# Altium PCB PCB1.PcbDoc
Units mm, origin at the board's own origin, x right, y up, seen from the top; angles counter-clockwise.
Board outline 144 x 160 mm, 2 copper layers (Top Layer, Bottom Layer); 92 components, 60 nets, 325 pads, 2 vias.
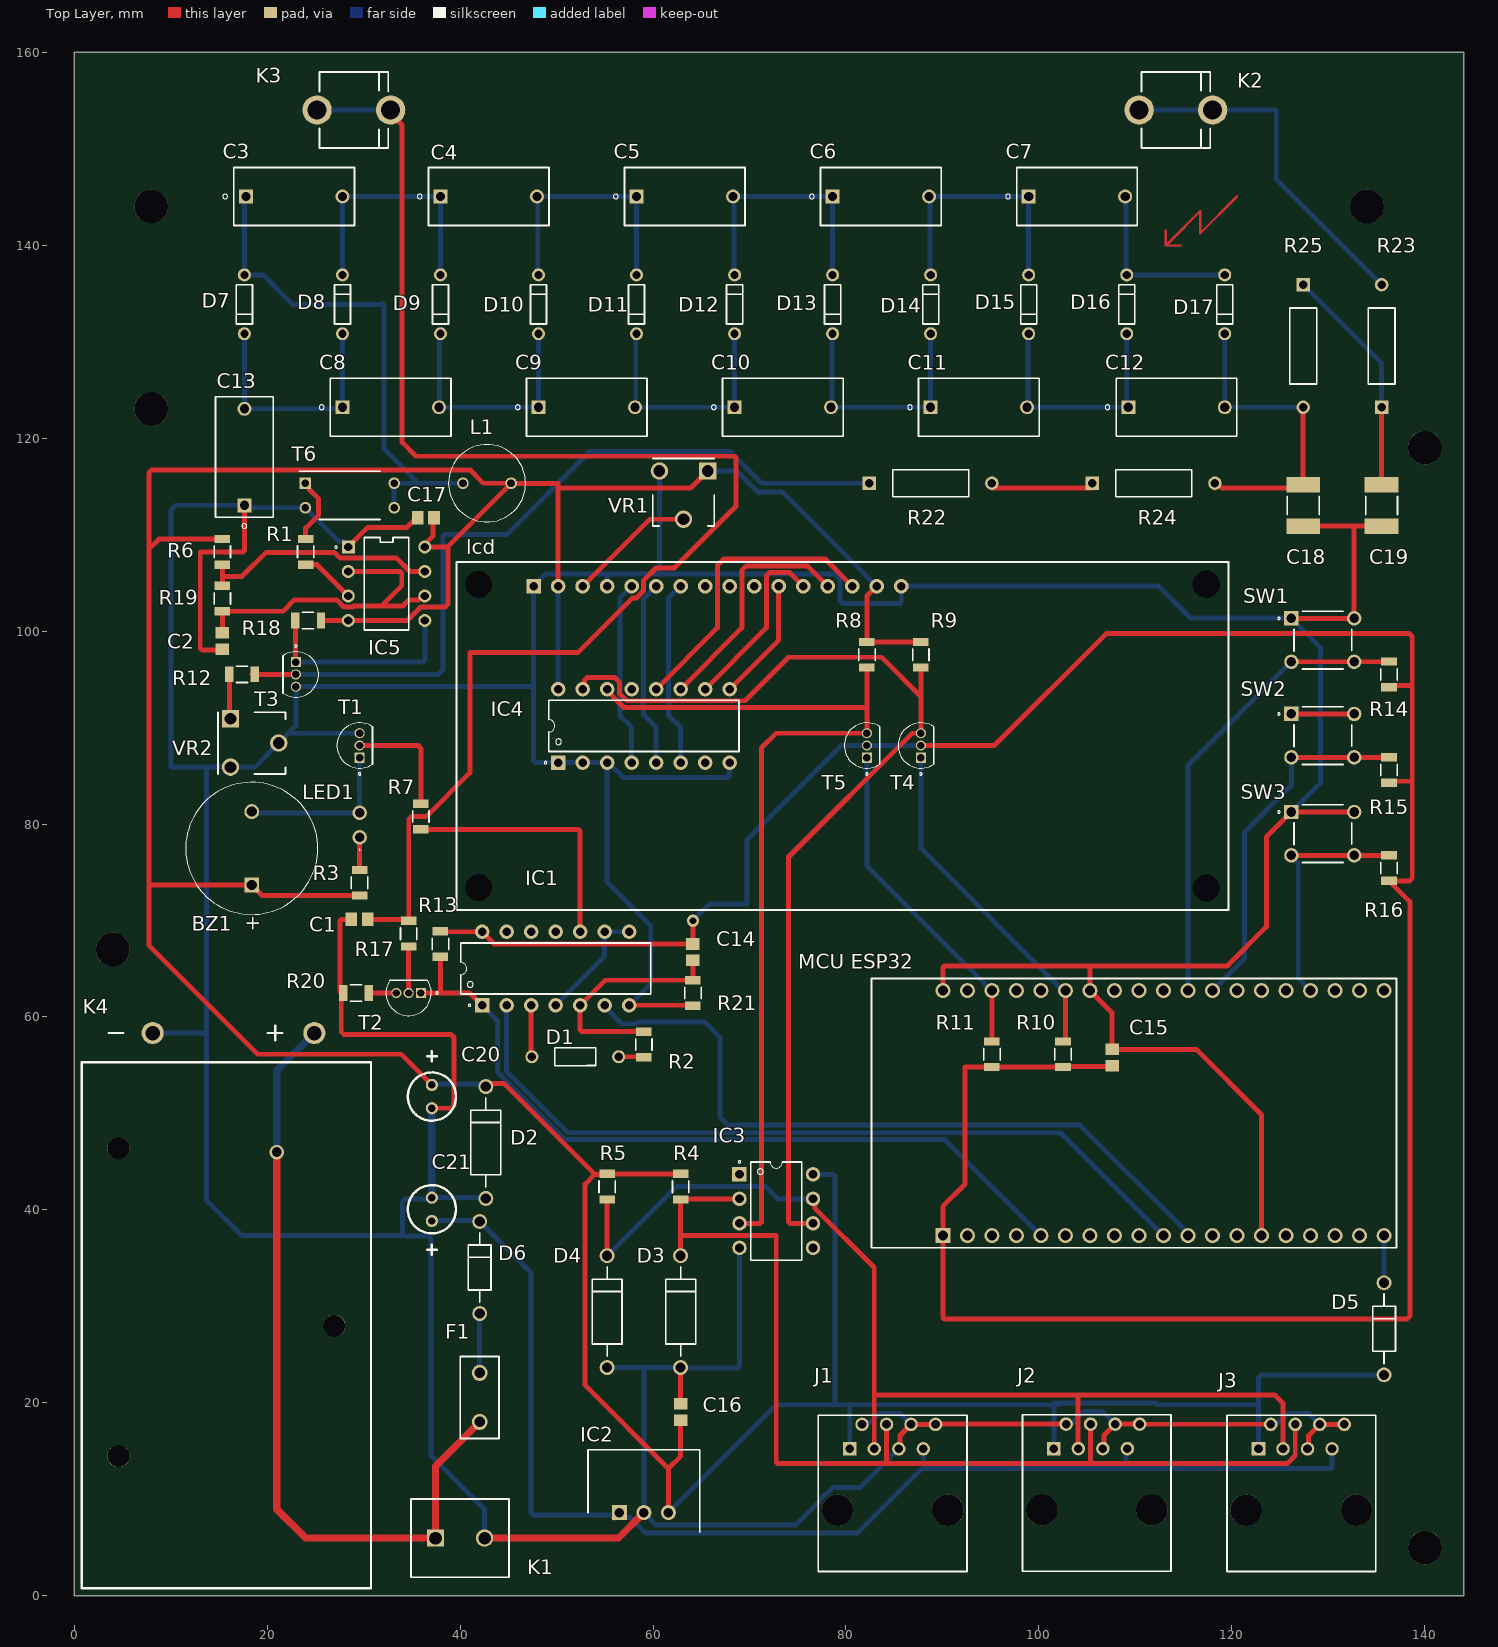
[diagram p0: Top Layer view]
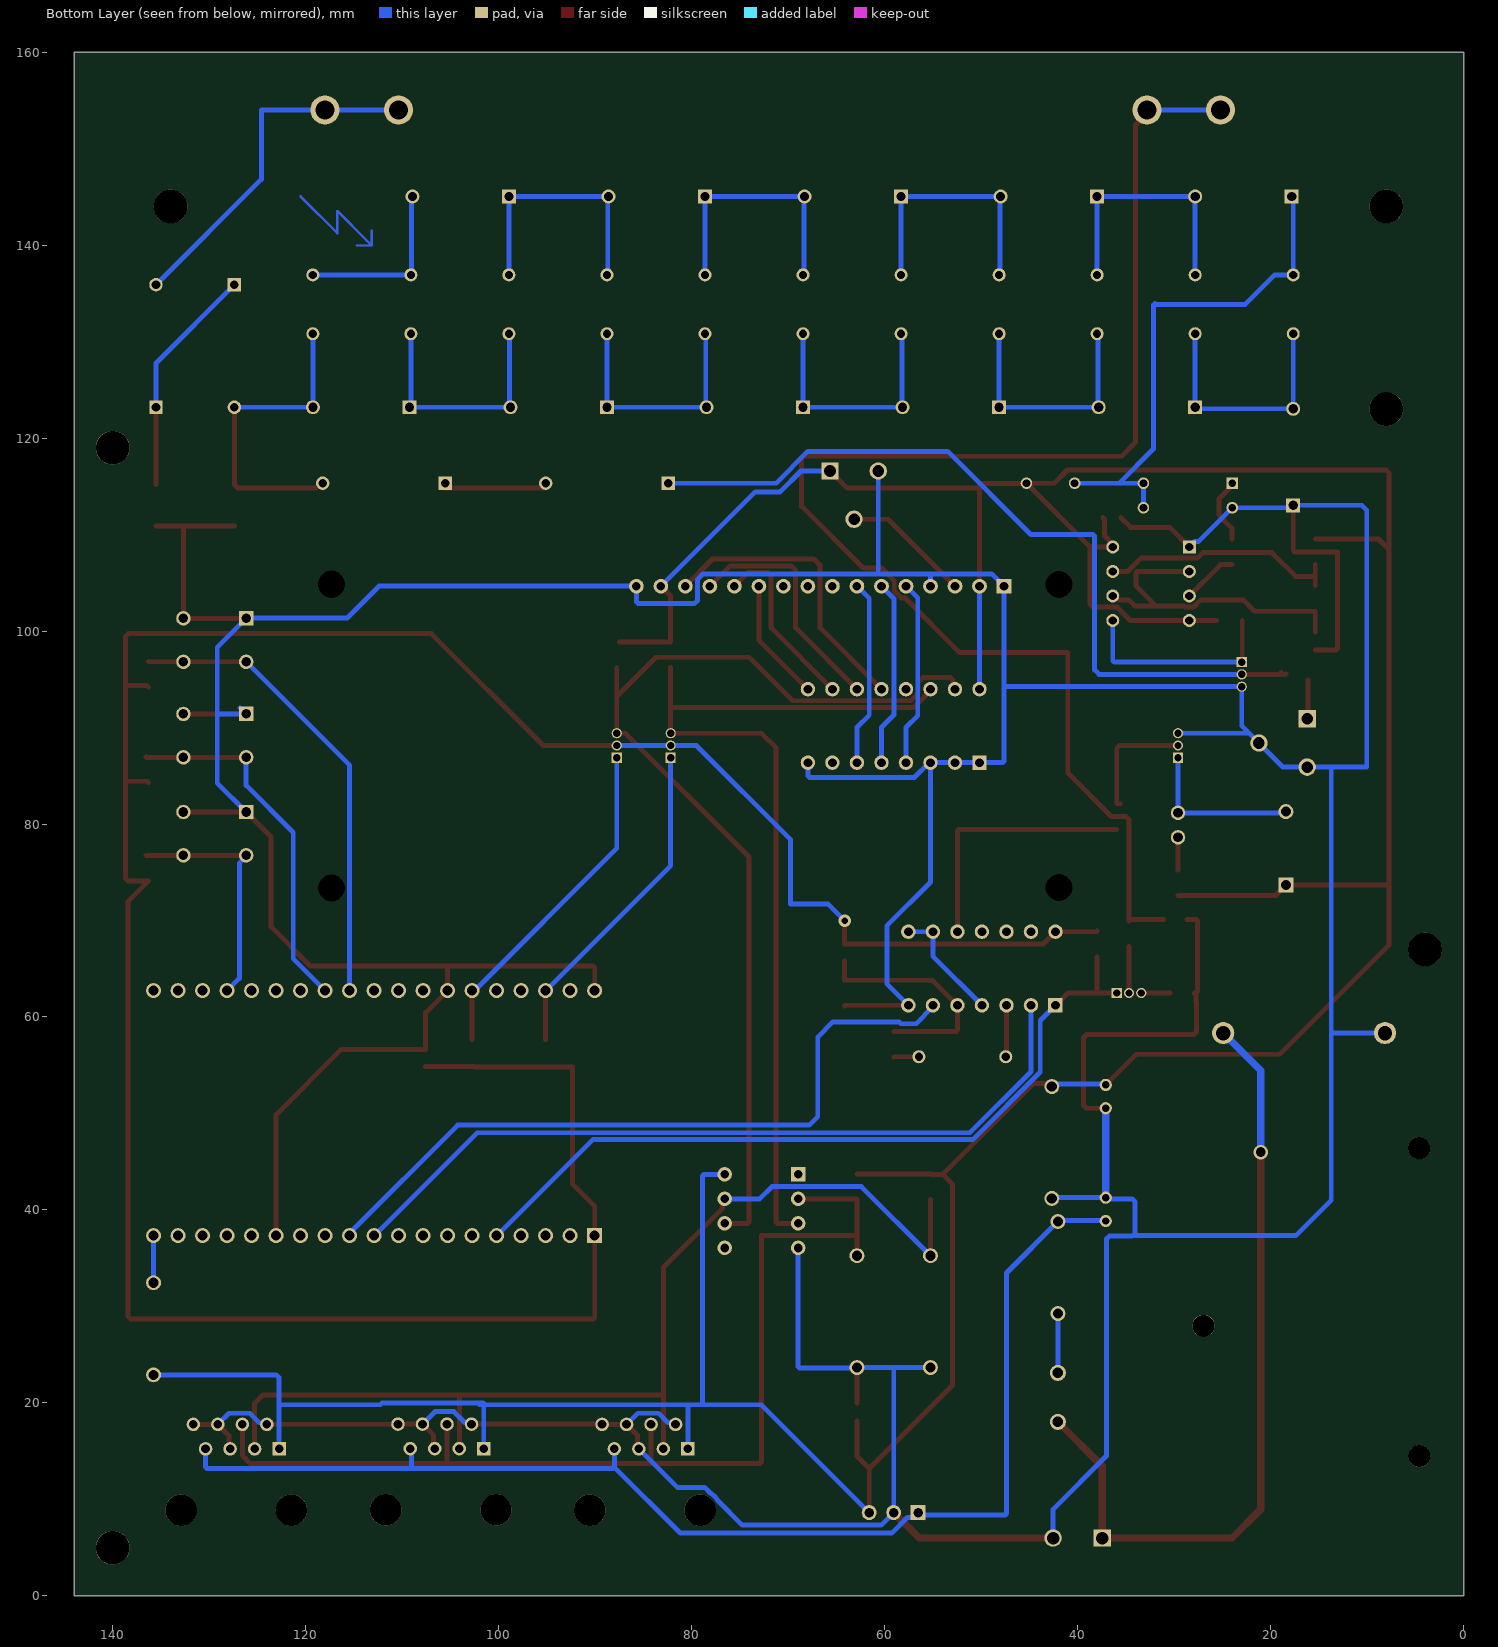
[diagram p1: Bottom Layer view, seen from below]

## Layer stack, top to bottom
Top Solder: solder mask 0.0102, Solder Resist, Dk 3.5
Top Layer: signal copper 0.0356
Dielectric 1: dielectric 0.32, FR-4, Dk 4.8
Bottom Layer: signal copper 0.0356
Bottom Solder: solder mask 0.0102, Solder Resist, Dk 3.5

## Board outline
0,0 0,160 144,160 144,0

## Design rules (kind name [scope] priority, off if disabled: settings)
Clearance [All] p1: gap=0.254 ignorepadtopadclearanceinfootprint=FALSE except(0: Arc-Hole Track-Hole SMDPad-Hole THPad-Hole Via-Hole Fill-Hole Poly-Hole Region-Hole Text-Hole; 0.127: SMDPad-SMDPad; 0.15: Arc-Text Track-Text SMDPad-Text THPad-Text; 0.2: Arc-Arc Arc-Track Arc-SMDPad Arc-THPad Track-Track Track-SMDPad Track-THPad SMDPad-THPad THPad-THPad)
HoleSize [All] p1: absolutevalues=TRUE maxlimit=6.3 minlimit=0.2 maxpercent=80.000 minpercent=20.000
HoleToHoleClearance [All] p1: gap=0.5 allowstackedmicrovias=TRUE
MinimumSolderMaskSliver [All] p1: minsoldermaskwidth=0
PolygonConnect [All] p1: connectstyle=Relief reliefconductorwidth=0.254 reliefentries=4 polygonreliefangle="90 Angle" airgapwidth=0.254
RoomDefinition Sheet1 [InComponentClass('Sheet1')] p1: confinementstyle=ConfineOut formatcopy=TRUE lockcomponents=FALSE outline -38.227,-119.126 12.573,-119.126 12.573,-93.726 -38.227,-93.726
RoutingVias [All] p1: holewidth=0.711 width=1.27 viastyle="Through Hole" minholewidth=0.711 minwidth=1.27 maxholewidth=0.711 maxwidth=1.27
SilkToSilkClearance [All] p1: silktosilkclearance=0
SilkToSolderMaskClearance [IsPad] p1: minsilkscreentomaskgap=0.15 clearancetoexposedcopper=TRUE
SolderMaskExpansion [All] p1: expansion=0.102 istentingtop=FALSE
Width [All] p1: maxlimit=0.762 minlimit=0.254 preferedwidth=0.508 minimp=50.000000 maximp=50.000000 favimp=50.000000
25 further rules are at their usual default settings.

## Components (designator, comment, footprint, x,y, rotation, side; value= is the part's Value field where it differs from the comment)
BZ1 "KPEG242" KINGS-KPEG242-2 18.415,77.47 r90 top
C1 "330 pF" CAPC2013X70X45NL10T25 29.591,70.104 r0 top
C2 "330 pF" CAPC2013X70X45NL10T25 15.367,98.969 r90 top
C3 "22nF" VISH-BFC233820104-2_V 17.813,145.034 r0 top
C4 "22nF" VISH-BFC233820104-2_V 37.973,145.034 r0 top
C5 "22nF" VISH-BFC233820104-2_V 58.293,145.034 r0 top
C6 "22nF" VISH-BFC233820104-2_V 78.613,145.034 r0 top
C7 "22nF" VISH-BFC233820104-2_V 98.933,145.034 r0 top
C8 "22nF" VISH-BFC233820104-2_V 27.813,123.19 r0 top
C9 "22nF" VISH-BFC233820104-2_V 48.133,123.19 r0 top
C10 "22nF" VISH-BFC233820104-2_V 68.453,123.19 r0 top
C11 "22nF" VISH-BFC233820104-2_V 88.773,123.19 r0 top
C12 "22nF" VISH-BFC233820104-2_V 109.253,123.19 r0 top
C13 "22nF" VISH-BFC233820104-2_V 17.653,113.03 r90 top
C14 "100nF X7R 50V" CAPC2013X70X45NL10T25 64.135,66.711 r90 top
C15 "100nF X7R 50V" CAPC2013X70X45NL10T25 107.569,55.789 r270 top
C16 "100nF X7R 50V" CAPC2013X70X45NL10T25 62.865,19.05 r270 top
C17 "100nF X7R 50V" CAPC2013X70X45NL10T25 36.449,111.76 r0 top
C18 "100nF 630 V" CAPC1812(4532)125_M 127.381,113.03 r90 top value=470nF
C19 "100nF 630V" CAPC1812(4532)125_M 135.509,113.03 r90 top value=470nF
C20 "100uF 16V" "100uf 16V elco" 37.084,50.546 r90 top
C21 "100uF 16V" "100uf 16V elco" 37.084,41.275 r270 top
D1 "1N4148" NXP-SOD27-2_V 51.943,55.88 r0 top
D2 "SA5.0A" ONSC-AXIAL_LEAD-2-59AA-01_P 42.672,46.99 r270 top
D3 "SA5.0A" ONSC-AXIAL_LEAD-2-59AA-01_P 62.865,29.464 r270 top
D4 "SA5.0A" ONSC-AXIAL_LEAD-2-59AA-01_P 55.245,29.464 r270 top
D5 "1N5819" ONSC-AXIAL_LEAD-2-59-10_P 135.763,27.686 r270 top
D6 "1N5819" ONSC-AXIAL_LEAD-2-59-10_P 42.037,34.036 r270 top
D7 "BAV21" MCSM-DO-35-2 17.653,133.858 r270 top
D8 "BAV21" MCSM-DO-35-2 27.813,133.858 r90 top
D9 "BAV21" MCSM-DO-35-2 37.973,133.858 r270 top
D10 "BAV21" MCSM-DO-35-2 48.133,133.858 r90 top
D11 "BAV21" MCSM-DO-35-2 58.293,133.858 r270 top
D12 "BAV21" MCSM-DO-35-2 68.453,133.858 r90 top
D13 "BAV21" MCSM-DO-35-2 78.613,133.858 r270 top
D14 "BAV21" MCSM-DO-35-2 88.773,133.858 r90 top
D15 "BAV21" MCSM-DO-35-2 98.933,133.858 r270 top
D16 "BAV21" MCSM-DO-35-2 109.093,133.858 r90 top
D17 "BAV21" MCSM-DO-35-2 119.253,133.858 r270 top
F1 "500mA" 39211000000 42.037,23.114 r270 top
IC1 "CD4093BE" N0014A 49.911,65.024 r90 top
IC2 "173010578" 173010578 56.515,8.636 r0 top
IC3 "P82B715P" P0008A 72.771,39.878 r0 top
IC4 "PCF8574N" N0016A 59.055,90.17 r90 top
IC5 "ICM7555IPAZ" Intersil_ICM7555IPAZ_0 32.385,104.902 r0 top
J1 "615008138021" 615008138021 84.836,10.64 r0 top
J2 "615008138021" 615008138021 105.985,10.668 r0 top
J3 "615008138021" 615008138021 127.194,10.64 r0 top
K1 "1729128" PHOE-1729128-2_V 40,6 r0 top
K2 "6mm fuseholder" FP-102-MFG 114.19,154 r180 top
K3 "6mm fuseholder" FP-102-MFG 29,154 r180 top
K4 "9V Battery" PCBComponent_1#1 0.775,55.29 r180 top
L1 "47uH" WE-TI-LS 42.799,115.316 r180 top
lcd "" PCBComponent_1#2 47.625,104.648 r0 top locked
LED1 "151033GS03000" 151033GS03000 29.591,78.613 r90 top
"MCU ESP32" "ESP32-DEVKITC-32D" MODULE_ESP32-DEVKITC-32D 109.803,50.038 r90 top locked
R1 "47" FP-RC1206-IPC_C 24.003,108.204 r270 top
R2 "330" FP-RC1206-IPC_C 59.055,57.15 r90 top
R3 "330" FP-RC1206-IPC_C 29.591,73.914 r90 top
R4 "330" FP-RC1206-IPC_C 62.865,42.418 r90 top
R5 "330" FP-RC1206-IPC_C 55.245,42.418 r90 top
R6 "3k3" FP-RC1206-IPC_C 15.367,108.204 r90 top
R7 "4k7" FP-RC1206-IPC_C 35.941,80.772 r270 top
R8 "4k7" FP-RC1206-IPC_C 82.169,97.536 r90 top
R9 "4k7" FP-RC1206-IPC_C 87.757,97.536 r90 top
R10 "4k7" FP-RC1206-IPC_C 102.489,56.134 r270 top
R11 "4k7" FP-RC1206-IPC_C 95.123,56.134 r270 top
R12 "5k6" FP-RC1206-IPC_C 17.399,95.504 r0 top
R13 "10k" FP-RC1206-IPC_C 37.973,67.564 r270 top
R14 "10k" FP-RC1206-IPC_C 136.271,95.504 r270 top
R15 "10k" FP-RC1206-IPC_C 136.271,85.598 r270 top
R16 "10k" FP-RC1206-IPC_C 136.271,75.438 r270 top
R17 "27k" FP-RC1206-IPC_C 34.671,68.637 r90 top
R18 "27k" FP-RC1206-IPC_C 24.257,101.092 r0 top
R19 "27k" FP-RC1206-IPC_C 15.367,103.378 r90 top
R20 "100k" FP-RC1206-IPC_C 29.21,62.484 r180 top
R21 "470k" FP-RC1206-IPC_C 64.135,62.484 r90 top
R22 "1M" RES_VR25 95.123,115.316 r0 top
R23 "1M" RES_VR25 127.381,123.19 r270 top
R24 "4M7" RES_VR25 118.237,115.316 r0 top
R25 "4M7" RES_VR25 135.509,135.89 r90 top
SW1 "tactile switch 10mm" TECO-1825910-6_V 129.413,99.06 r0 top
SW2 "tactile switch 10mm" TECO-1825910-6_V 129.413,89.154 r0 top
SW3 "tactile switch 10mm" TECO-1825910-6_V 129.413,78.994 r0 top
T1 "BC547B" ONSC-TO-92-3-29-11 29.591,88.138 r90 top
T2 "BC547B" ONSC-TO-92-3-29-11 34.671,62.484 r180 top
T3 "BC547B" ONSC-TO-92-3-29-11 22.987,95.504 r270 top
T4 "2N7000" ONSC-TO-92-3-29-11 87.757,88.138 r90 top
T5 "2N7000" ONSC-TO-92-3-29-11 82.169,88.138 r90 top
T6 "" DIP920W60P254L490H337Q4N 28.575,114.046 r0 top
VR1 "" RM065102 65.659,116.586 r180 top
VR2 "" RM065102 16.209,90.892 r270 top

## Footprints (in the part's own frame and the unit in brackets; to place one, negate y for a bottom-side part, rotate by r counter-clockwise, add the part's x,y. Pads: shape width x height; smd on the part's side, far side on the other; paste and mask are expansions set on the pad)
"100uf 16V elco" [mil]
  round 50 hole 30: 1(0,0) 2(95,0)
  silkscreen extent -51,-98 232,98
151033GS03000 [mm]
  round 1.5 hole 1: 1(0,0) 2(2.54,0)
  silkscreen extent -1.33,-0.05 -1.23,0.05, body extent -0.4,-1.5 2.94,1.5, height 5.65
173010578 [mm]
  rect 1.55x1.55 hole 1: 1(0,0)
  round 1.55 hole 1: 2(2.54,0) 3(5.08,0)
  silkscreen extent -3.26,-2 8.34,6.5
39211000000 [mm]
  round 1.65 hole 1.1: 1(0,0) 2(5.08,0)
  silkscreen extent -1.71,-2 6.79,2, body extent -1.71,-2 6.79,2, height 8.1
615008138021 [mm] "Modular Jack Vertical Plastic 8P8C"
  rect 1.4x1.4 hole 0.9: 1(-4.445,4.6)
  round 1.4 hole 0.9: 2(-3.175,7.14) 3(-1.905,4.6) 4(-0.635,7.14) 5(0.635,4.6) 6(1.905,7.14) 7(3.175,4.6) 8(4.445,7.14)
  round 3.25 hole 3.25 unplated: MH1(-5.715,-1.75) MH2(5.715,-1.75)
  silkscreen extent -7.7,-8.1 7.7,8.1, body extent -7.7,-8.1 7.7,8.1, height 16.5
CAPC1812(4532)125_M [mm] "Chip Capacitor, Body 4.5x3.2mm, Height 1.25mm, IPC Low Density"
  rect 1.6x3.5 smd: 1(-2.15,0) 2(2.15,0)
  silkscreen extent -0.95,-1.65 0.95,1.65, body extent -2.4,-1.7 2.4,1.7, height 1.25
CAPC2013X70X45NL10T25 [mm] "Chip Capacitor, 2-Leads, Body 2.00x1.25mm, IPC Medium Density"
  rect 1.2x1.4 smd: 1(-0.85,0) 2(0.85,0)
  body extent -1.05,-0.67 1.05,0.67, height 0.7
DIP920W60P254L490H337Q4N [mm]
  rect 1.2x1.2 hole 0.8: 1(-4.602,1.27)
  round 1.2 hole 0.8: 2(-4.602,-1.27) 3(4.602,-1.27) 4(4.602,1.27)
  silkscreen extent -5.2,-2.5 3.15,2.5, body extent -4.75,-2.45 4.75,2.45, height 3.37
FP-102-MFG [mm]
  round 3.03 hole 1.98 paste-1000 mask+0: 1(-3.81,0) 1(3.81,0)
  silkscreen extent -3.55,-3.94 3.55,3.94, body extent -5.43,-4.04 5.43,4.04, height 0.25
FP-RC1206-IPC_C [mm]
  rect 0.858x1.612 smd paste+0 mask+0: 1(-1.327,0) 2(1.327,0)
  silkscreen extent -0.6,-0.85 0.6,0.85, body extent -1.86,-0.95 1.86,0.95, height 0.25
Intersil_ICM7555IPAZ_0 [mm]
  rect 1.35x1.35 hole 0.85 paste-1000 mask+0: 1(-3.968,3.81)
  round 1.35 hole 0.85 paste-1000 mask+0: 2(-3.968,1.27) 3(-3.968,-1.27) 4(-3.968,-3.81) 5(3.968,-3.81) 6(3.968,-1.27) 7(3.968,1.27) 8(3.968,3.81)
  silkscreen extent -5.37,-4.79 2.3,4.79, body extent -4.74,-5.31 4.74,5.31, height 0.25
KINGS-KPEG242-2 [mm] "THD, 2-Leads, Dia 13.7mm, Pitch 7.62mm"
  rect 1.55x1.55 hole 1.05: 1(-3.81,0)
  round 1.55 hole 1.05: 2(3.81,0)
  silkscreen extent -6.85,-6.85 6.85,6.85, body extent -6.85,-6.85 6.85,6.85, height 7.6
MCSM-DO-35-2 [mm] "TH, 2-Leads, Dia 1.665mm, Body 4.065x1.665mm"
  round 1.35 hole 0.85: 1(-3.049,0) 2(3.049,0)
  silkscreen extent -2.03,-0.83 2.03,0.83, body extent -3.33,-0.83 3.33,0.83, height 1.67
MODULE_ESP32-DEVKITC-32D [mm]
  rect 1.56x1.56 hole 1.04: 1(-12.7,19.76)
  round 1.56 hole 1.04: 2(-12.7,17.22) 3(-12.7,14.68) 4(-12.7,12.14) 5(-12.7,9.6) 6(-12.7,7.06) 7(-12.7,4.52) 8(-12.7,1.98) 9(-12.7,-0.56) 10(-12.7,-3.1) 11(-12.7,-5.64) 12(-12.7,-8.18) 13(-12.7,-10.72) 14(-12.7,-13.26) 15(-12.7,-15.8) 16(-12.7,-18.34) 17(-12.7,-20.88) 18(-12.7,-23.42) 19(-12.7,-25.96) 20(12.7,19.76) 21(12.7,17.22) 22(12.7,14.68) 23(12.7,12.14) 24(12.7,9.6) 25(12.7,7.06) 26(12.7,4.52) 27(12.7,1.98) 28(12.7,-0.56) 29(12.7,-3.1) 30(12.7,-5.64) 31(12.7,-8.18) 32(12.7,-10.72) 33(12.7,-13.26) 34(12.7,-15.8) 35(12.7,-18.34) 36(12.7,-20.88) 37(12.7,-23.42) 38(12.7,-25.96)
  silkscreen extent -13.95,-27.25 13.95,27.15, body extent -13.97,-24.8 13.97,30.3, height 3.25
N0014A [mm] "DIP, 14-Leads, Body 19.7x6.6mm, Pitch 2.54mm"
  rect 1.5x1.5 hole 0.9: 1(-3.81,7.62)
  round 1.5 hole 0.9: 2(-3.81,5.08) 3(-3.81,2.54) 4(-3.81,0) 5(-3.81,-2.54) 6(-3.81,-5.08) 7(-3.81,-7.62) 8(3.81,-7.62) 9(3.81,-5.08) 10(3.81,-2.54) 11(3.81,0) 12(3.81,2.54) 13(3.81,5.08) 14(3.81,7.62)
  silkscreen extent -3.93,-9.85 2.65,9.85, body extent -3.95,-9.85 3.95,9.85, height 5.08
N0016A [mm] "DIP, 16-Leads, Body 19.7x6.6mm, Pitch 2.54mm"
  rect 1.5x1.5 hole 0.9: 1(-3.81,8.89)
  round 1.5 hole 0.9: 2(-3.81,6.35) 3(-3.81,3.81) 4(-3.81,1.27) 5(-3.81,-1.27) 6(-3.81,-3.81) 7(-3.81,-6.35) 8(-3.81,-8.89) 9(3.81,-8.89) 10(3.81,-6.35) 11(3.81,-3.81) 12(3.81,-1.27) 13(3.81,1.27) 14(3.81,3.81) 15(3.81,6.35) 16(3.81,8.89)
  silkscreen extent -3.93,-9.85 2.65,10.31, body extent -3.95,-9.85 3.95,9.85, height 5.08
NXP-SOD27-2_V [mm] "SOD27, 2-Leads, Dia 1.85mm, Body Length 4.25mm, Pin Spacing 9mm"
  round 1.35 hole 0.85: 1(-4.5,0) 2(4.5,0)
  silkscreen extent -2.12,-0.92 2.13,0.92, body extent -4.78,-0.92 4.78,0.92, height 1.84
ONSC-AXIAL_LEAD-2-59-10_P [mm] "AXIAL, 2-Leads, Diameter 2.35mm"
  round 1.55 hole 1.05: 1(-4.77,0) 2(4.77,0)
  silkscreen extent -3.59,-1.17 3.59,1.17
ONSC-AXIAL_LEAD-2-59AA-01_P [mm] "AXIAL, 2-Leads, Diameter 3.1mm"
  round 1.55 hole 1.05: 1(-5.795,0) 2(5.795,0)
  silkscreen extent -4.62,-1.55 4.62,1.55
ONSC-TO-92-3-29-11 [mm] "TO, 3-Leads, Body Dia 4.7mm, Pitch 1.27mm"
  rect 1.05x1.05 hole 0.77: 1(-1.27,0)
  round 1.05 hole 0.77: 2(0,0) 3(1.27,0)
  silkscreen extent -3.07,-1.34 2.35,2.35, body extent -2.35,-1.33 2.36,2.36, height 7.87
P0008A [mm] "DIP, 8-Leads, Body 10.15x6.6mm, Pitch 2.54mm"
  rect 1.5x1.5 hole 0.9: 1(-3.81,3.81)
  round 1.5 hole 0.9: 2(-3.81,1.27) 3(-3.81,-1.27) 4(-3.81,-3.81) 5(3.81,-3.81) 6(3.81,-1.27) 7(3.81,1.27) 8(3.81,3.81)
  silkscreen extent -3.93,-5.1 2.65,5.23, body extent -3.95,-5.07 3.95,5.07, height 5.08
PCBComponent_1#1 [mm]
  round 2.3 hole 1.5: 1(-24.13,-3.048) 2(-7.366,-3.048)
  round 2.3 hole 2.3: 3(-26.175,27.3) 3(-3.825,40.8) 3(-3.825,8.89)
  silkscreen extent -30,-3.81 0,54.5, body extent -29.97,0 0,54.61, height 0.25
PCBComponent_1#2 [mm]
  rect 1.524x1.524 hole 0.889: 1(0,0)
  round 1.524 hole 0.889: 2(2.54,0) 3(5.08,0) 4(7.62,0) 5(10.16,0) 6(12.7,0) 7(15.24,0) 8(17.78,0) 9(20.32,0) 10(22.86,0) 11(25.4,0) 12(27.94,0) 13(30.48,0) 14(33.02,0) 15(35.56,0) 16(38.1,0)
  silkscreen extent -8,-33.57 72.01,2.5, body extent -8.13,-33.7 72.14,2.63, height 16
PHOE-1729128-2_V [mm] "Receptacle, 2-Leads, Body 8.1x10.16mm, Pitch 5.08mm"
  rect 1.8x1.8 hole 1.3: 1(-2.54,0)
  round 1.8 hole 1.3: 2(2.54,0)
  silkscreen extent -5.08,-4.05 5.08,4.05, body extent -5.65,-4.05 5.08,4.05, height 10.01
RES_VR25 [mil]
  rect 55x55 hole 35: 1(-500,0)
  round 55 hole 35: 2(0,0)
  silkscreen extent -405,-55 -95,55, body extent 0,0 10,10, height 10
RM065102 [mm]
  rect 1.8x1.8 hole 1.2: 1(0,0)
  round 1.8 hole 1.2: 2(2.5,5) 3(5,0)
  silkscreen extent -0.7,-1.3 5.7,5.7, body extent -0.7,-1.3 5.7,5.7, height 7.6
TECO-1825910-6_V [mm] "Switch, 4-Leads, Body 5.99x5.99mm"
  rect 1.5x1.5 hole 0.99: 1(-3.25,2.25)
  round 1.5 hole 0.99: 2(3.25,2.25) 3(-3.25,-2.25) 4(3.25,-2.25)
  silkscreen extent -4.67,-2.99 2.99,3, body extent -3,-2.99 2.99,3, height 5
VISH-BFC233820104-2_V [mm] "THD, 2-Leads, Body 12.5x6mm, Height 12mm, Pitch 10mm"
  rect 1.45x1.45 hole 0.95 mask+0.1: 1(0,0)
  round 1.45 hole 0.95 mask+0.1: 2(10,0)
  silkscreen extent -2.4,-3 11.25,3, body extent -1.25,-3 11.25,3, height 12
WE-TI-LS [mm] "THT Inductor, 2-Leads, Body 8.0 x 8.0 mm"
  round 1.2 hole 0.82: 1(-2.5,0) 2(2.5,0)
  silkscreen extent -4,-4 4,4, body extent -4.13,-4.13 4.15,4.15, height 5.5

## Part data
BZ1: library part CMP-2000-06518-1, "Piezo Indicator, 4100 Hz, 3 to 16 V, -20 to 70 degC, 2-Pin THD, RoHS", Current - Max=7A, Frequency Range=3600to4600Hz, Manufacturer=KingstateElectronicsCorp., Maximum Resonant Frequency=4600Hz, Maximum Supply Current=7mA, Operating Temperature=-20to70°C, Package Description="2-Pin Through Hole Device, Body Dia 13.7 mm, Pitch 7.62 mm", PartNumber=KPE-242, Typical Operating Supply Voltage=12Vdc, Category=AudioIndicatorsandAlerts, Datasheet URL=https://datasheet.ciiva.com/11776/0900766b8068f3a2-11776713.pdf, Datasheet Version=01/2006, Manufacturer URL=http://www.kingstate.com.tw/index.php/en/, Minimum Sound Pressure=70dBA, Mounting=ThroughHole, Mounting Technology=ThroughHole, Package Reference=KPEG242, Product Diameter=13.7mm, Product Height=7.6mm, Technology=Piezo, Termination Method=Pin, Tone Mode=Continuous, Type=Indicator
C1 C2 C14 C15 C16 C17: library part CMP-2007-00889-1, Manufacturer=Murata, Part Number=GRM2165C1H332JA01D
C3 C4 C5 C6 C7 C8 C9 C10 C11 C12 C13: library part CMP-0478-00361-1, "Condensator X2 Condensator 275VAC X2 Polypropyleen Film Condensator 0.022Uf 22nF Pitch 10Mm12.5 x 6 x 12 mm THD, RoHS, Bulk", Capacitance="0.1 uF", Capacitance Tolerance="+/- 20%", Manufacturer="Vishay Semiconductor", PartNumber=BFC233820104, Permisssible DC Voltage="630 V", Rated AC Voltage="310 V", Rated Voltage Pulse Slope="600 V/us", ComponentLink1Description="Manufacturer URL", ComponentLink1URL=http://www.vishay.com/, ComponentLink2Description=Datasheet, ComponentLink2URL=http://www.vishay.com/docs/28119/mkp3382.pdf, ComponentLink3Description="Package Specification", ComponentLink3URL=http://www.vishay.com/docs/28119/mkp3382.pdf, DatasheetVersion=Jul-13, Mounting Technology="Through Hole", PackageDescription="2-Pin THD, Body 12.5 x 6 mm, Height 12 mm, Pitch 10mm", PackageReference=BFC233820104-2, PackageVersion=Jul-13, Packing=Bulk, RoHS=TRUE
C18 C19: library part CMP-1040-01539-1, "CAP 470nF 50V ±10% 1812 (4532 Metric) Thickness 1.25mm SMD", Case-EIA=1812, Case-Metric=4532, Rated Voltage="50 V", Tolerance=Â±10%, Max Thickness="1.25 mm", Technology=SMT
C20 C21 K4 lcd: library part Component_1
D1: library part CMP-0648-00002-1, "High-speed Diode, 100 V, 450 mA, 2-Pin SOD27, RoHS", Manufacturer="NXP Semiconductors", Cd="4 pF Max.", ComponentLink1Description="Manufacturer URL", ComponentLink1URL=http://www.nxp.com/, ComponentLink2Description=Datasheet, ComponentLink2URL=http://www.nxp.com/documents/data_sheet/1N4148_1N4448.pdf, ComponentLink3Description="Package Specification", ComponentLink3URL=http://www.nxp.com/documents/data_sheet/1N4148_1N4448.pdf, Configuration=Single, DatasheetVersion=Aug-04, IF="200 mA Max.", IFRM="450 mA", IFSM="4 A Max.", IR (VR="20 V)=25 nA", Mounting Technology="Through Hole", PackageDescription="2-Pin Hermetically Sealed Glass Package, Axial Leaded, Dia 1.85 mm, Body Length 4.25 mm, Lead Spread 25.4 mm", PackageReference=SOD27, PackageVersion=Aug-04, PartNumber=1N4148, RoHS=TRUE, Trr="4 ns Max.", VF (IF="10 mA)=1 V", VR="100 V Max."
D2 D3 D4: library part CMP-1061-00012-1, "500 W Peak Power, MiniMOSORB(TM) Zener Transient Voltage Suppressor, Unidirectional, 2-Pin Axial_Lead, Bulk Box", Manufacturer="On Semiconductor", ComponentLink1Description="Manufacturer URL", ComponentLink1URL=http://www.onsemi.com/, ComponentLink2Description=Datasheet, ComponentLink2URL=http://www.onsemi.com/pub_link/Collateral/SA5.0A-D.PDF, ComponentLink3Description="Package Specification", ComponentLink3URL=http://www.onsemi.com/pub_link/Collateral/59AA.PDF, DatasheetVersion="Rev. 13", Direction=Unidirectional, IR Max (uA)=600, Mounting Technology="Through Hole", PackageDescription="2-Pin, Axial Lead, Diameter 3.1 mm", PackageReference=AXIAL_LEAD-2-59AA-01, PackageVersion="Rev. A, 02/2007", Packing="Bulk Box", PartNumber=SA5.0A, PPK Max (W)=500, V(BR) Typ (V)=6.7
D5 D6: library part CMP-1055-00042-1, "Rectifier, 2-Pin Axial_Lead, Pb-Free, Bulk Bag", Manufacturer="On Semiconductor", ComponentLink1Description="Manufacturer URL", ComponentLink1URL=http://www.onsemi.com/, ComponentLink2Description=Datasheet, ComponentLink2URL=http://www.onsemi.cn/pub_link/Collateral/1N5817-D.PDF, ComponentLink3Description="Package Specification", ComponentLink3URL=http://www.onsemi.cn/pub_link/Collateral/59-10.PDF, Configuration=Single, DatasheetVersion="Rev. 10", IFSM Max (A)=25, Mounting Technology="Through Hole", Note1=0, PackageDescription="2-Pin, Axial Lead, Diameter 2.35 mm", PackageReference=AXIAL_LEAD-2-59-10, PackageVersion="Rev. U, 02/2005", Packing="Bulk Bag", PartNumber=1N5819, RoHS=TRUE
D7 D8 D9 D10 D11 D12 D13 D14 D15 D16 D17: library part CMP-2000-06494-1, "BAV21TR Diode 250V 0.2A DO35", Breakdown Voltage=100V, Manufacturer=Microsemi, Operating Temperature=-65to200°C, Output Current=0.2A, Package=2DO-35, Package Description="2-Pin Axial Lead, Dia 1.665 mm, Body Length 4.065 mm", Package Reference=DO-35-2, PartNumber=1N4148-1, Peak Forward Voltage=1.2@0.1AV, Peak Reverse Current=0.5uA, Peak Reverse Repetitive Voltage=75V, Configuration=Single, Datasheet URL=http://www.microsemi.com/document-portal/doc_download/125211-lds-0281, Datasheet Version="Rev. 1, 11/2012", Manufacturer URL=http://www.microsemi.com/, Mounting=ThroughHole, Mounting Technology=ThroughHole, Packaging=Bulk, Peak Average Forward Current=0.2A, Peak Reverse Recovery Time=5ns, Rad Hard=No, Type=SwitchingDiode
F1: library part 39211000000, "Fuse", Manufacturer_Name=LITTELFUSE, Mouser Part Number=576-3921100000, Arrow Part Number=39211000000, Arrow Price/Stock=https://www.arrow.com/en/products/39211000000/littelfuse, Datasheet Link=https://datasheet.lcsc.com/szlcsc/Littelfuse-39211000000_C99566.pdf, Height=8mm, Manufacturer_Part_Number=39211000000, Mouser Price/Stock=https://www.mouser.co.uk/ProductDetail/Littelfuse/39211000000?qs=x71drwq5GondAmkqFlpf6Q%3D%3D
IC1: library part CMP-1627-00493-3, "CMOS Quad 2-Input NAND Schmitt Triggers, N0014A, TUBE", F @ Nom Voltage(Max)(Mhz)=8, Generic Part Number=CD4093B, ICC @ Nom Voltage(Max)(mA)=0.06, Manufacturer="Texas Instruments", Operating Temperature Range(C)="-55 to 125", Rating=Catalog, Voltage(Nom)(V)=10, Bits(#)=4, Code_JEDEC=MS-001, DatasheetVersion=SCHS115D, Input Type=CMOS, Output Drive (IOL/IOH)(Max)(mA)=1.5/-1.5, Output Type=CMOS, PackageReference=N0014A, Schmitt Trigger=Yes, Technology Family=CD4000, VCC(Max)(V)=18, VCC(Min)(V)=3
IC2: "Undefined or Miscellaneous", Manufacturer_Name="Wurth Elektronik", Mouser2 Part Number=710-173010578, Datasheet Link=https://componentsearchengine.com//173010578.pdf, Height=8.5mm, Manufacturer_Part_Number=173010578, Mouser2 Price/Stock=https://www.mouser.com/Search/Refine.aspx?Keyword=710-173010578
IC3: library part CMP-0314-00015-2, "I2C Bus Extender, 2 Channel Width, 3.0 to 12.0 V, -40 to 85 degC, 8-pin PDIP (P), Pb-Free (RoHS)", 5V Tolerant I/O=Yes, Manufacturer="Texas Instruments", Master Side I2C Bus Capacitance Supported(pF)=400, Channel Width=2, Code_JEDEC=MS-001-BA, ComponentLink1Description=Datasheet, ComponentLink1URL=http://www.ti.com/general/docs/lit/getliterature.tsp?genericPartNumber=P82B715&fileType=pdf, ComponentLink2Description="Package Specification", ComponentLink2URL=http://www.ti.com/litv/pdf/mpdi001b, DatasheetVersion=SCPS145A, Eco-Plan="Green (RoHS & no Sb/Br)", Max Frequency(kHz)=400, Mounting Technology=Through-hole, Open Drain I/O Type=Yes, PackageDescription="8-Pin Plastic Dual-In-Line Package, Row Spacing 7.62 mm, Pitch 2.54 mm", PackageReference=P0008A, PackageVersion="revE, Apr-2010", PartNumber=P82B715P, Slave Side I2C Bus Capacitance Supported(pF)=400, SubFamily="I2C Hub, Buffer, Repeater", Vcc range(V)="3.0 to 12.0", VCC(Max)(V)=12, VCC(Min)(V)=3
IC4: library part CMP-0314-00016-2, "Remote 8-Bit I/O Expander for I2C-Bus, 2.5 to 6 V, -40 to 85 degC, 16-pin PDIP (N), Pb-Free (RoHS)", Manufacturer="Texas Instruments", Max Frequency(kHz)=100, Voltage Nodes(V)="5, 3.3", # of I/Os=8, Code_JEDEC=MS-001*, ComponentLink1Description=Datasheet, ComponentLink1URL=http://www.ti.com/general/docs/lit/getliterature.tsp?genericPartNumber=PCF8574&fileType=pdf, ComponentLink2Description="Package Specification", ComponentLink2URL=http://www.ti.com/litv/pdf/mpdi002c, DatasheetVersion=SCPS068G, Eco-Plan="Green (RoHS & no Sb/Br)", fSCLK(Max)(MHz)=0.1, I2C Address="0100 xxx", Interrupt Output=Yes, Mounting Technology=Through-hole, PackageDescription="16-Pin Plastic Dual-In-Line Package, Row Spacing 7.62 mm, Pitch 2.54 mm", PackageReference=N0016A, PackageVersion="revE, Dec-2002", PartNumber=PCF8574N, Push-Pull I/O Type=Yes, Reset Input=No, SubFamily="I2C IO Expander", Vcc range(V)="2.5 to 6.0", VCC(Max)(V)=6, VCC(Min)(V)=2.5
J1 J2 J3: library part CMP-1502-01725-1, "Modular Jack WR-MJ, Plastic, Vertical Entry, THT, 8P8C", Contact Resistance=20mOhm, Manufacturer="Wurth Elektronik", Operating Temperature=-40to85degC, Rated Current=1.5A, Withstanding Voltage=1000VAC, Working Voltage=120VAC, Compliance=Leadfree/RoHS, Datasheet URL=https://katalog.we-online.de/em/datasheet/615008138021.pdf, Entrance=Vertical, Manufacturer URL=http://www.we-online.de, Mounting Technology=THT, Package Reference=615008138021, Packaging=Tray, Part Number=615008138021, Pin Number=8P8C, Port=1x1, Publisher=WurthElektronik
K1: library part CMP-2000-05815-1, "PCB Terminal Block, 13.5 A, 400 V, 2-Pin THD, RoHS, Bulk", Current Rating=13500mA, Manufacturer="Phoenix Contact", Package Description="2-Pin Through Hole Device, Body 8.1 x 10.16 mm, Pitch 5.08 mm", Package Reference=1729128-2, Package Version=03/2015, Voltage Rating=400V, Datasheet URL=https://datasheet.ciiva.com/16046/1729128-16046181.pdf, Datasheet Version=12/2013, Manufacturer URL=http://www.phoenixcontact.com/, Mounting Technology=ThroughHole, No. of Positions=2, No. of Rows=1, Orientation=Horizontal, Package URL=https://www.phoenixcontact.com/online/portal/pi/pxc/product_detail_page/!ut/p/b1/3VdJjqNKFDxLH8AFycySyWY2ozFsEPOMMQaDOX1XedGL_1Vdm5YXJleknhSKeBkvI6EA8ncAo3AYoDhBQGco6KN7VURTdemj9us_IEKEZo_YHiPAEWEFmDGOHMORkqKYCORBZxgL7ZoaZYcbFFUZ3fqxSY6GOuxydWUuHqz1ynmMFygu583Bob0Ewr6Sd_l-5m-kAueHiB0jpRwZwe58wwtkpxtMYd_LmGcDRU02dRNEyWt6Y2ti5pSyJ_reIkzIulrqApdnbT11V5jnCKbYNCvhEM1MCpPByat_X379-iThf08CI5GfOPqfBeS3BRoBOdD55AKVv0iLwCMq-2BrzXWSGRH7pUGD9uwXQjiph3xL0DKQwdGa0JImiIOmBNOestqgwTHSSs2oOep-78apyXQBvNi8ZLaFjvjWvcaUEBu0MC6Wbe-d6mB0FAebo2lUWinqYaZs5DAYzV0RP9yitUjnGJ0iI9xhZkT42OCQNUJJhkgWINNQLP2JFP6OpMg3JCVg70jqHT0lvKOnhHf0lPuOnnLf0VPuWx6_dxwUIvwk5WMkT0kLL1mh61l2yZVSzG3pYV_bqo-mj6uMKwKwdnnW8Jh5RTOJzMOA5c-eJDaZQw4mTMPH02PvS_ZAqNVjVTo2WyYLkwH_KU1mmmG5kjRhDqPXLwwVHvVOjCM60-fpXvTDfMGW1PVFVS1r4e4yVDk4ZdNbkUHvqPqQSeian4UD39fNKmachqdJ1NJbyk8rXT9mXTvPk3oE5meulKGgiruPJek-4I9hTT6G8ZLOyRSm2RRVbThERQad5OS28hdt4YW4vG0stgYYzsWsK4_7y6DZMjJSCqri1kyiZR5vD7pwIrNR7QwPHTcLTI5qT7eRlpHrdGiupYlqQDJ7zy_CND8fWWBoLRXxk1RVcXiBQwbTD4Xi7KL-FuO94t9xaqweXzH, Packing=Bulk, PartNumber=1729128, Pitch=5.08mm, RoHS=TRUE
K2 K3: library part CMP-08604-000017-1, "FUSE CLIP CARTRIDGE 250V 15A PCB", Fuse Current=15A, Manufacturer="Littelfuse Inc", Manufacturer Part Number=01020071Z, Package=102, Voltage Rating Ac=250V, Automotive=No, Category=Fuse, ComponentLink2Description=Datasheet, ComponentLink2URL=https://www.littelfuse.com/~/media/electronics/datasheets/fuse_clips/littelfuse_fuse_clip_102_122_datasheet.pdf.pdf, Conn Orientation=Vertical, Device Class L1="Circuit Protection", Device Class L2="Fuse Holders", Device Class L3=unset, Digikey Description="FUSE CLIP CARTRIDGE 250V 15A PCB", Height=10.67mm, Is Female=yes, Lead Free=Yes, Mouser Description="Fuse Clips ACS 3AG PC CLIP", Number Of Fuses=1, Octopart=https://octopart.com/01020071z-littelfuse-18837869, RoHS=TRUE, Voltage Rating Dc=250V
L1: library part CMP-0225-00030-1, "Radial Leaded Wire Wound Inductor WE-TI, L = 100 µH", Inductance="100 ÂµH", ComponentLink1Description="Manufacturer Link", ComponentLink1URL=http://www.we-online.com, ComponentLink2Description=Datasheet, ComponentLink2URL=http://www.we-online.de/katalog/media/pdf/744741101.pdf, DatasheetVersion="ver 2, Nov-2004", PackageDescription="THT Inductor, 2-Leads, Body 8.0 x 8.0 mm", PackageReference=WE-TI-LS, PackageVersion=2004
LED1: "LED", Manufacturer_Name="Wurth Elektronik", Mouser Part Number=710-151033GS03000, Datasheet Link=https://www.mouser.com/datasheet/2/445/151033GS03000-1715304.pdf, Height=5.55mm, Manufacturer_Part_Number=151033GS03000, Mouser Price/Stock=https://www.mouser.com/Search/Refine.aspx?Keyword=710-151033GS03000
"MCU ESP32": "EVAL BOARD FOR ESP-WROOM-32", Package=None, Availability=Warning, Check_prices=https://www.snapeda.com/parts/ESP32-DEVKITC-32D/Espressif%20Systems/view-part/2777395/?ref=eda, MF="Espressif Systems", MP=ESP32-DEVKITC-32D, Price=None, Purchase-URL=https://pricing.snapeda.com/search/part/ESP32-DEVKITC-32D/?ref=eda, SnapEDA_Link=https://www.snapeda.com/parts/ESP32-DEVKITC-32D/Espressif%20Systems/view-part/2777395/?ref=snap
R1 R2 R3 R4 R5 R6 R7 R8 R9 R10 R11 R12 R13 R14 R15 R16 R17 R18 R19 R20 R21: library part "1206 weerstand"
R22 R23 R24 R25: library part VR25000001004JA100, "No Description Available", Built_By=EMA_UL_Team, Copyright="Copyright (C) 2018 Accelerated Designs. All rights reserved", Manufacturer_Part_Number=VR25000001004JA100, RefDes=RefDes, Type=DEV, Vendor=Vishay
SW1 SW2 SW3: library part CMP-1684-00021-1, "Tact Switch, SPST-NO, 0.05 A, -35 to 85 degC, 4-Pin THD, RoHS, Bulk", Actuator Color=Black, Contact Rating @ Voltage=0.05A@24VDC, Dielectric Strength=500VAC, Manufacturer="TE Connectivity", Maximum AC Voltage Rating=N/A, Maximum Contact Resistance=100mOhm, Maximum DC Voltage Rating=24V, Minimum Insulation Resistance=100MOhm, Operating Temperature=-35to85C, Package Description="4-Pin Through Hole Device, Body 5.99 x 5.99 mm, Pitch 6.5 mm", Package Reference=THD, Part No=1825910-6, Actuator Length=1.4mm, Actuator Material=PolybutyleneTerephthalate, Actuator Style=RoundButton, Base Material=N/A, Body Orientation=Straight, Bushing Type=Unthreaded, Contact Material=CopperAlloy, Contact Plating=Silver, Datasheet URL=http://www.te.com/commerce/DocumentDelivery/DDEController?Action=showdoc&DocId=Customer+Drawing%7F1825910%7FC9%7Fpdf%7FEnglish%7FENG_CD_1825910_C9.pdf%7F1825910-6, Datasheet Version="Rev. C9", Dimension=5.99x5mm, Electrical Life=100000Cycles, Family=1825910, Function=MomentaryContact, Housing Material=N/A, Illumination=N/R, Manufacturer URL=http://www.te.com, Mechanical Life=100000Cycles, Mounting=ThroughHole, Packaging=N/A, Pole Throw Configuration=SPST, Product Weight=N/A, RoHS=Yes, Seal Description=N/A, Seal Location=N/A, Switch Configuration=OFF(ON), Terminal Type=PCPins, Thread Size=N/R
T1 T2 T3: library part CMP-1048-01467-1, "Amplifier Transistor, NPN Silicon, 3-Pin TO-92, Bulk Box", Manufacturer="On Semiconductor", ComponentLink1Description="Manufacturer URL", ComponentLink1URL=http://www.onsemi.com/, ComponentLink2Description=Datasheet, ComponentLink2URL=http://www.onsemi.com/pub_link/Collateral/BC546-D.PDF, ComponentLink3Description="Package Specification", ComponentLink3URL=http://www.onsemi.cn/pub_link/Collateral/2N6426-D.PDF, DatasheetVersion="Rev. 7", fT Min (MHz)=150, IC Continuous (A)=0.1, Mounting Technology="Through Hole", PackageDescription="3-Pin Transistor Outline, Body 4.825 x 3.685 mm, Pitch 1.27 mm", PackageReference=TO-92-3-29-11_AM_SL, PackageVersion="Rev. AM", Packing="Bulk Box", PartNumber=BC547B, Polarity=NPN, RoHS=FALSE
T4 T5: library part CMP-1058-00936-1, "Small Signal MOSFET, 200 mA, 60 V, N-Channel, 3-Pin TO-92, Bulk Box", Manufacturer="On Semiconductor", Package Type=TO-92, Channel Polarity="N Channel", Ciss Typ (pF)=60, ComponentLink1Description="Manufacturer URL", ComponentLink1URL=http://www.onsemi.com/, ComponentLink2Description=Datasheet, ComponentLink2URL=http://www.onsemi.com/pub_link/Collateral/2N7000-D.PDF, ComponentLink3Description="Package Specification", ComponentLink3URL=http://www.onsemi.cn/pub_link/Collateral/2N6426-D.PDF, Configuration=Single, Coss Typ (pF)=25, Crss Typ (pF)=5, DatasheetVersion="Rev. 8", ID Max (A)=0.2, Mounting Technology="Through Hole", PackageDescription="3-Pin Transistor Outline, Body 4.825 x 3.685 mm, Pitch 1.27 mm", PackageReference=TO-92-3-29-11_AM_SL, PackageVersion="Rev. AM", Packing="Bulk Box", PartNumber=2N7000, PD Max (W)=0.35, V(BR)DSS Min (V)=60, VGS Max (V)=20, VGS(th) Max (V)=3
T6: library part IRLD110PBF, "MOSFET (N-Channel)", Manufacturer_Name=Vishay, Mouser Part Number=844-IRLD110PBF, Arrow Part Number=IRLD110PBF, Arrow Price/Stock=https://www.arrow.com/en/products/irld110pbf/vishay, Datasheet Link=http://uk.rs-online.com/web/p/products/0301338P, Height=3.37mm, Manufacturer_Part_Number=IRLD110PBF, Mouser Price/Stock=https://www.mouser.co.uk/ProductDetail/Vishay-Siliconix/IRLD110PBF/?qs=cvaI6ThkwxutctgzXpBGHg%3D%3D
VR1 VR2: library part RM-065-102, "Variable Resistor", Manufacturer_Name=Marutsu, Datasheet Link=https://www.marutsu.co.jp/contents/shop/marutsu/datasheet/RM-065.pdf, Height=7.5mm, Manufacturer_Part_Number=RM-065-102

## Free pads (board coordinates)
  round 3.5 hole 3.5: 1(4,67) 1(8,123) 1(8,144) 1(134,144) 1(140,5) 1(140,119)
  round 1.524 hole 2.8: 1(41.924,104.819) 2(41.924,73.42) 3(117.334,104.847) 4(117.334,73.379)

## Via types
v1: diameter 1.5, hole 1, Top Layer to Bottom Layer, 1 vias
v2: diameter 1.27, hole 0.711, Top Layer to Bottom Layer, 1 vias

## Nets (pads, with @x,y where several pads share a name; then routed paths per layer and width w, separated by ;. In a path a pad name is that pad's centre, name@x,y a point inside that pad or via, vN(x,y) a via of type N, cw(c..) or ccw(c..) an arc to the next point about the centre after c; other vN are vias at no path point)
+3V3: "MCU ESP32.1" C14.2 C15.2 IC1.14 R10.2 R11.2 R13.1 R14.2 R15.2 R16.2 T4.2 T5.2 | length 289.2
  Top Layer w0.508: R13.1 38.03,68.834 IC1.14 43.561,67.564 64.132,67.564 64.135,67.567 v2(64.135,69.977) ; T4.2 95.377,88.138 106.969,99.73 138.386,99.73 138.684,99.432 138.684,94.19 ; C15.2@107.569,54.864 102.546,54.864 R10.2 R11.2 92.329,54.807 92.329,42.672 90.043,40.386 90.043,37.338 90.043,28.851 90.192,28.702 138.132,28.702 138.43,29 138.43,71.952 136.468,73.914 R16.2 136.306,74.076 138.386,74.076 138.684,74.374 138.684,84.49 ; R15.2 136.433,84.433 138.627,84.433 138.684,84.49 ; R14.2 136.433,94.339 138.535,94.339 138.684,94.19 ; 138.684,84.49 138.684,94.19
  Bottom Layer w0.508: v2(64.135,69.977) 65.881,71.723 69.743,71.723 69.743,78.379 79.502,88.138 T5.2 T4.2@87.503,88.138
+5: BZ1.1 C16.2 C17.2 C20.2 D2.1 D5.2 IC2.3 IC3.8 IC4.16 IC5.4 IC5.8 J1.1 J2.1 J3.1 L1.1 lcd.2 lcd.15 R3.1 R4.2 R5.2 R6.2 R8.2 R9.2 R18.2 VR1.1 | length 461.2
  Top Layer w0.508: R6.2 8.82,109.531 7.747,108.458 ; R18.2 IC5.4 34.531,101.092 35.928,102.489 38.437,102.489 38.735,102.787 38.735,108.752 ; R3.1 19.488,72.587 BZ1.1 7.747,73.66 ; C20.2 33.909,56.134 19.05,56.134 7.747,67.437 7.747,73.66 ; C17.2@37.374,111.76 37.211,111.597 37.211,109.855 36.353,108.996 IC5.8 38.695,108.712 38.735,108.752 ; D2.1@42.672,52.832 42.625,52.832 D2.1 42.973,53.086 44.577,53.086 53.975,43.688 ; lcd.2 50.165,114.808 ; IC2.3 61.595,13.208 ; C16.2@62.865,18.125 62.865,14.478 61.595,13.208 ; R4.2 R5.2 55.188,43.688 53.975,43.688 ; VR1.1 63.881,114.808 50.165,114.808 ; lcd.15 82.169,103.632 R8.2 R9.2@87.503,98.863 ; 7.747,73.66 7.747,108.458 ; 7.747,108.458 7.747,116.39 8.045,116.688 41.046,116.688 42.418,115.316 L1.1 ; 38.735,108.752 L1.1 ; L1.1 45.31,115.305 50.154,115.305 50.165,115.294 50.165,114.808 ; 53.975,43.688 52.959,42.672 52.959,21.844 61.595,13.208
  Bottom Layer w0.508: C20.2@36.83,52.705 37.036,52.705 37.37,53.039 D2.1@42.672,53.039 ; IC4.16 lcd.2 ; IC2.3 72.771,19.812 79.016,19.812 ; VR1.1 68.668,116.586 70.827,114.427 73.406,114.427 lcd.15 ; IC3.8 78.718,43.688 78.867,43.539 78.867,19.961 79.016,19.812 ; J1.1 80.391,19.812 ; J2.1 101.54,19.685 101.413,19.812 101.603,20.002 102.013,20.002 112.066,20.002 112.256,19.812 122.749,19.812 ; 102.013,19.812 101.54,19.812 80.391,19.812 ; J3.1 122.749,19.812 ; D5.2@135.523,22.916 123.047,22.916 122.749,22.618 122.749,19.812 ; 79.016,19.812 80.391,19.812
GND: "MCU ESP32.14" "MCU ESP32.20" "MCU ESP32.26" C1.1 C2.1 C13.1 C15.1 C16.1 C17.1 C18.1 C19.1 C20.1 C21.1 D2.2 D3.2 D4.2 IC1.7 IC2.2 IC3.4 IC4.1 IC4.2 IC4.3 IC4.8 IC5.1 J1.2 J1.5 J1.6 J1.8 J2.2 J2.5 J2.6 J2.8 J3.2 J3.5 J3.6 J3.8 K1.2 K4.2 lcd.1 lcd.4 lcd.16 R20.2 R21.1 SW1.1 SW1.2 SW2.1 SW2.2 SW3.1 SW3.2 T1.3 T3.3 T6.2 VR1.3 VR2.2 VR2.3 | length 773
  Top Layer w0.508: C2.1@15.367,98.044 13.23,98.044 13.081,98.193 13.081,108.204 17.504,108.204 17.653,108.353 C13.1 ; R20.2@27.756,62.484 27.559,62.681 27.559,69.955 27.708,70.104 C1.1@28.666,70.104 ; R20.2 27.708,62.309 27.708,61.656 27.686,61.634 27.686,58.464 27.984,58.166 39.072,58.166 39.37,57.868 39.37,50.844 39.072,50.546 C20.1 ; IC5.1 30.449,110.744 34.508,110.744 C17.1@35.524,111.76 ; IC1.7 64.078,61.214 R21.1 ; C16.1@62.865,19.975 D3.2 ; J1.5@85.592,15.361 85.592,16.631 J1.6 J1.8 89.309,17.808 J2.2 J2.2@102.895,17.808 ; 90.043,62.738 90.043,65.129 90.192,65.278 105.134,65.278 ; J2.5@106.741,15.389 106.741,16.659 J2.6 J2.8 110.444,17.794 124.005,17.794 J3.2 ; C15.1 116.299,56.639 123.063,49.875 123.063,37.338 ; C15.1@107.569,56.714 107.569,60.452 105.283,62.738 105.283,65.129 105.134,65.278 ; SW2.1 SW2.2 ; SW1.1 SW1.2 132.663,110.828 132.715,110.88 ; C18.1 132.715,110.88 ; J3.5@127.95,15.361 127.95,16.631 J3.6 J3.8 ; SW3.2 SW3.1 123.571,78.652 123.571,69.342 119.507,65.278 105.134,65.278 ; C19.1 132.715,110.88
  Top Layer w0.762: K1.2 56.419,6 IC2.2
  Bottom Layer w0.508: K4.2@8.113,58.326 13.622,58.326 13.716,58.42 ; IC5.1 27.869,109.26 27.489,109.26 T6.2 17.907,112.776 C13.1 10.541,113.03 10.033,112.522 10.033,85.892 13.716,85.892 ; T1.3 22.225,89.408 ; 34.036,37.338 17.399,37.338 13.716,41.021 13.716,58.42 ; C21.1 36.957,41.148 34.334,41.148 34.036,40.85 34.036,37.592 34.334,37.294 36.702,37.294 37,36.997 37,14.521 42.54,8.981 K1.2 ; C21.1@37.338,41.275 42.592,41.275 D2.2 ; D4.2 59.055,23.669 ; lcd.4 55.245,105.918 ; IC1.7 59.766,63.449 59.766,69.444 55.245,73.965 IC4.3 ; VR1.3 60.659,105.998 60.579,105.918 ; IC4.8 67.945,84.985 67.796,84.836 56.896,84.836 55.372,86.36 IC4.3 ; IC3.4 68.961,23.771 68.812,23.622 62.912,23.622 D3.2 59.055,23.669 ; J1.2 81.832,17.951 82.441,17.951 83.425,18.934 85.587,18.934 J1.6 ; J1.5 81.481,11.25 78.644,11.25 78.089,10.695 ccw(c79.121,8.89) 77.316,9.922 74.735,7.341 60.35,7.341 IC2.2 59.055,23.669 ; J2.2 102.981,17.979 103.517,17.979 104.642,19.104 106.594,19.104 J2.6 ; J3.2 124.19,17.951 124.799,17.951 125.783,18.934 127.945,18.934 J3.6 ; SW3.1 129.159,84.24 129.159,91.404 ; SW2.1@126.786,92.027 SW2.1 129.159,91.404 ; 13.716,58.42 13.716,85.892 ; 13.716,85.892 VR2.3 18.709,85.892 VR2.2 22.225,89.408 ; 22.225,89.408 22.987,90.17 T3.3 47.447,94.234 47.625,94.412 ; 47.625,94.412 lcd.1 48.895,105.918 55.245,105.918 ; 47.625,94.412 47.625,86.509 47.774,86.36 IC4.1 IC4.2 IC4.3 ; 55.245,105.918 60.579,105.918 ; 60.579,105.918 78.816,105.918 79.375,105.359 79.375,103.168 79.673,102.87 85.576,102.87 85.725,103.019 lcd.16 112.395,104.648 115.697,101.346 126.127,101.346 SW1.1 129.159,98.314 129.159,91.404
  Bottom Layer w0.762: C21.1 C20.1
NetBZ1_2: BZ1.2 LED1.2 T1.1 | length 16.8
  Bottom Layer w0.508: BZ1.2 18.542,81.153 LED1.2@29.464,81.153 ; LED1.2 29.591,82.296 T1.1
NetC1_2: C1.2 K3.1 R17.2 | length 152.3
  Top Layer w0.508: 31.115,70.104 34.531,70.104 R17.2 34.671,70.129 34.681,70.139 34.681,80.469 34.979,80.767 36.486,80.767 41.021,85.302 41.021,97.79 52.249,97.79 57.891,103.432 58.289,103.432 59.001,104.144 59.001,105.229 60.308,106.536 62.213,106.536 68.602,112.925 68.602,117.961 68.453,118.11 35.433,118.11 34,119.543 34,152.441 32.81,153.631 K3.1@32.81,154
  Bottom Layer w0.508: K3.1@25.19,154 K3.1@32.81,154
NetC2_2: C2.2 IC5.2 IC5.6 R19.1 | length 34.3
  Top Layer w0.508: C2.2@15.367,99.894 R19.1 21.66,102.051 22.835,103.226 27.227,103.226 27.964,102.489 28.871,102.489 28.958,102.576 31.841,102.576 ; IC5.2 33.813,106.172 33.961,106.023 33.961,104.697 31.841,102.576 ; IC5.6 36.125,103.632 35.718,103.226 34.687,103.226 34.038,102.576 31.841,102.576
NetC3_1: C3.1 D7.1 L1.2 T6.3 T6.4 | length 53.5
  Bottom Layer w0.508: C3.1 17.653,144.874 D7.1 19.579,136.907 22.628,133.858 31.982,133.858 ; 31.982,133.932 32.131,133.784 ; 32.131,133.709 32.131,118.872 35.687,115.316 ; T6.3 T6.4 35.687,115.316 ; L1.2 35.687,115.316
NetC3_2: C3.2 C4.1 D8.2 D9.1 | length 26.4
  Bottom Layer w0.508: D8.2 C3.2 C4.1 D9.1
NetC4_2: C4.2 C5.1 D10.2 D11.1 | length 26.5
  Bottom Layer w0.508: D10.2@48.053,136.987 48.053,144.954 C4.2 C5.1 D11.1
NetC5_2: C5.2 C6.1 D12.2 D13.1 | length 26.5
  Bottom Layer w0.508: D12.2@68.373,136.987 68.373,144.954 C5.2 C6.1 D13.1
NetC6_2: C6.2 C7.1 D14.2 D15.1 | length 26.5
  Bottom Layer w0.508: D14.2@88.693,136.987 88.693,144.954 C6.2 C7.1 D15.1
NetC7_2: C7.2 D16.2 D17.1 | length 18.3
  Bottom Layer w0.508: C7.2 109.013,144.954 D16.2@109.013,136.907 ; D16.2@109.492,136.906 D17.1@119.652,136.906
NetC8_1: C8.1 C13.2 D7.2 D8.1 | length 25.6
  Bottom Layer w0.508: D7.2 C13.2 27.653,123.03 C8.1 D8.1
NetC8_2: C8.2 C9.1 D9.2 D10.1 | length 25.5
  Bottom Layer w0.508: D9.2@37.893,130.729 37.893,123.27 C8.2 C9.1 D10.1
NetC9_2: C9.2 C10.1 D11.2 D12.1 | length 25.5
  Bottom Layer w0.508: D11.2@58.213,130.729 58.213,123.27 C9.2 C10.1 D12.1
NetC10_2: C10.2 C11.1 D13.2 D14.1 | length 25.5
  Bottom Layer w0.508: D13.2@78.533,130.729 78.533,123.27 C10.2 C11.1 D14.1
NetC11_2: C11.2 C12.1 D15.2 D16.1 | length 25.8
  Bottom Layer w0.508: D15.2@98.853,130.809 98.853,123.27 C11.2 C12.1 109.093,123.35 D16.1
NetC12_2: C12.2 C18.2 D17.2 R23.2 R24.2 | length 33.3
  Top Layer w0.508: R24.2@118.16,114.808 118.401,115.049 118.716,115.049 118.957,114.808 127.009,114.808 C18.2 R23.2
  Bottom Layer w0.508: D17.2 C12.2 R23.2
NetC14_1: C14.1 IC1.5 R2.2 R21.2 | length 24
  Top Layer w0.508: R2.2 52.6,58.477 52.451,58.626 IC1.5 55.048,63.811 R21.2 C14.1@64.135,65.786
NetC19_2: C19.2 R23.1 R25.1 | length 24.1
  Top Layer w0.508: C19.2 R25.1
  Bottom Layer w0.508: R23.1 135.509,127.762 R25.1
NetD1_1: D1.1 IC1.3 | length 5.4
  Top Layer w0.508: D1.1@47.299,55.626 D1.1@47.335,55.662 ; IC1.3 47.371,55.952 D1.1
NetD1_2: D1.2 R2.1 | length 2.6
  Top Layer w0.508: D1.2 58.998,55.88 R2.1
NetD3_1: D3.1 IC3.2 J1.4 J2.4 J3.4 R4.1 | length 113.7
  Top Layer w0.508: D3.1 62.865,37.338 ; IC3.2 62.922,41.148 R4.1 62.865,37.338 ; J1.4 84.201,13.97 83.947,13.716 ; J2.4 105.35,13.865 105.201,13.716 ; J3.4 126.559,14.554 125.721,13.716 107.801,13.716 ; 62.865,37.338 72.771,37.338 72.771,13.865 72.92,13.716 83.947,13.716 ; 83.947,13.716 84.201,13.716 105.201,13.716 ; 105.201,13.716 107.801,13.716 ; 105.201,13.716 107.801,13.716
NetD4_1: D4.1 IC3.7 J1.3 J2.3 J3.3 R5.1 | length 114.8
  Top Layer w0.508: D4.1 R5.1 ; IC3.7 76.771,40.958 76.771,40.196 82.931,34.036 82.931,20.828 ; J1.3 82.931,20.828 ; J2.3 104.055,15.293 104.055,20.828 ; J3.3 125.289,19.982 124.443,20.828 106.655,20.828 ; 82.931,20.828 104.055,20.828 ; 104.055,20.828 106.655,20.828 ; 104.055,20.828 106.655,20.828
  Bottom Layer w0.508: D4.1 62.404,42.418 71.664,42.418 72.934,41.148 IC3.7
NetD5_1: "MCU ESP32.19" D5.1 | length 5.1
  Bottom Layer w0.508: D5.1 135.763,37.592
NetD6_2: D6.2 F1.1 | length 6.2
  Bottom Layer w0.508: F1.1 D6.2
NetF1_2: F1.2 K1.1 K4.1 | length 82.7
  Top Layer w0.762: v1(21,46) 21,9 24,6 K1.1 37.46,13.457 F1.2
  Bottom Layer w0.508: K1.1 K1.1@37.497,6.037 ; F1.2@42,17.997 F1.2
  Bottom Layer w0.762: v1(21,46) 21,54.449 K4.1@24.877,58.326
NetIC1_1: "MCU ESP32.5" IC1.1 R13.2 T2.1 | length 81.3
  Top Layer w0.508: T2.1 37.973,62.484 ; R13.2 37.973,62.484 ; IC1.1 41.021,62.484 37.973,62.484
  Bottom Layer w0.508: IC1.1 43.873,59.632 43.873,54.298 50.876,47.295 90.246,47.295 100.006,37.535
NetIC1_2: "MCU ESP32.10" IC1.2 | length 81.9
  Bottom Layer w0.508: IC1.2 44.831,54.341 51.166,48.006 102.235,48.006 112.851,37.39
NetIC1_4: IC1.4 IC1.8 IC1.9 | length 12.5
  Bottom Layer w0.508: IC1.4 54.991,66.294 IC1.9@54.991,68.326 ; IC1.9 IC1.9@54.991,68.326 ; IC1.8 55.499,68.834 IC1.9@54.991,68.326
NetIC1_6: "MCU ESP32.11" IC1.6 | length 75.2
  Bottom Layer w0.508: IC1.6 54.991,61.05 56.739,59.302 58.323,59.302 58.508,59.487 65.354,59.487 66.929,57.912 66.929,49.679 67.814,48.793 104.242,48.793 115.349,37.686
NetIC1_10: IC1.10 R7.2 | length 27
  Top Layer w0.508: R7.2 52.302,79.445 52.451,79.296 IC1.10
NetIC3_3: IC3.3 IC4.14 R8.1 T5.3 | length 97.6
  Top Layer w0.508: IC4.14 55.245,93.816 56.993,92.068 69.828,92.068 69.835,92.075 82.169,92.075 ; IC3.3 71.098,38.608 71.247,38.757 71.247,87.884 72.771,89.408 T5.3 82.169,92.075 ; R8.1 82.169,92.075
NetIC3_6: IC3.6 IC4.15 R9.1 T4.3 | length 107.5
  Top Layer w0.508: IC4.15 52.895,94.17 52.895,94.891 53.203,95.199 56.007,95.199 56.515,94.691 56.515,93.547 57.286,92.776 69.535,92.776 74.041,97.282 83.693,97.282 87.757,93.218 ; IC3.6 74.19,38.608 74.041,38.757 74.041,76.581 86.868,89.408 T4.3 87.757,93.218 ; R9.1 87.757,93.218
NetIC4_4: IC4.4 lcd.5 | length 19.3
  Bottom Layer w0.508: IC4.4 57.785,90.007 56.566,91.227 56.566,103.429 lcd.5
NetIC4_5: IC4.5 lcd.6 | length 19.4
  Bottom Layer w0.508: IC4.5 60.325,90.007 59.03,91.303 59.03,103.353 lcd.6
NetIC4_6: IC4.6 lcd.7 | length 19.3
  Bottom Layer w0.508: IC4.6 62.865,90.007 61.595,91.277 61.595,103.378 lcd.7
NetIC4_9: IC4.9 lcd.11 | length 12.8
  Top Layer w0.508: IC4.9 73.025,99.06 lcd.11
NetIC4_10: IC4.10 lcd.12 | length 19.2
  Top Layer w0.508: IC4.10 71.755,100.33 71.755,105.747 72.053,106.045 74.168,106.045 lcd.12
  Bottom Layer w0.508: IC4.10 IC4.10@65.643,94.218
NetIC4_11: IC4.11 lcd.13 | length 25.2
  Top Layer w0.508: IC4.11 69.215,100.33 69.215,106.281 69.687,106.753 76,106.753 lcd.13
  Bottom Layer w0.508: IC4.11 IC4.11@63.055,93.79
NetIC4_12: IC4.12 lcd.14 | length 30.9
  Top Layer w0.508: IC4.12 66.675,100.33 66.675,106.789 67.347,107.461 77.832,107.461 lcd.14
NetIC5_3: IC5.3 R1.2 | length 5.8
  Top Layer w0.508: R1.2 25.172,106.877 IC5.3
NetIC5_5: IC5.5 R18.1 T3.1 | length 21.9
  Top Layer w0.508: R18.1 22.93,96.831 T3.1
  Bottom Layer w0.508: T3.1 36.204,96.774 36.353,96.923 IC5.5
NetIC5_7: IC5.7 R6.1 R19.2 | length 25
  Top Layer w0.508: R19.2 15.367,105.813 ; R6.1 15.367,105.813 ; IC5.7 34.814,106.172 33.403,107.583 27.554,107.583 27.01,108.128 19.863,108.128 17.399,105.664 15.516,105.664 15.367,105.813
NetK2_1: K2.1 R25.2 | length 36.8
  Bottom Layer w0.508: K2.1@110.38,154 118,154 124.587,154 124.587,146.812 R25.2
Netlcd_3: lcd.3 VR1.2 | length 13.4
  Top Layer w0.508: lcd.3@52.197,104.394 lcd.3@52.217,104.414 ; lcd.3 59.643,111.586 VR1.2 VR1.2@63.139,111.566
NetLED1_1: LED1.1 R3.2 | length 3.4
  Top Layer w0.508: R3.2 LED1.1
"NetMCU ESP32_22": "MCU ESP32.22" R11.1 T5.1 | length 34.7
  Top Layer w0.508: R11.1@95.123,57.684 95.123,62.738 95.123,62.938
  Bottom Layer w0.508: T5.1 82.169,75.692 95.123,62.738
"NetMCU ESP32_25": "MCU ESP32.25" R10.1 T4.1 | length 36
  Top Layer w0.508: R10.1@102.743,57.658 102.743,62.738 102.743,63.087
  Bottom Layer w0.508: T4.1 87.757,77.47 102.737,62.49
"NetMCU ESP32_30": "MCU ESP32.30" R14.1 SW1.3 SW1.4 | length 48.5
  Top Layer w0.508: SW1.3 SW1.4 136.25,96.81 R14.1
  Bottom Layer w0.508: 115.443,62.839 115.443,86.09 SW1.3
"NetMCU ESP32_31": "MCU ESP32.31" R15.1 SW2.3 SW2.4 | length 37.7
  Top Layer w0.508: SW2.3 SW2.4 ; SW2.4@132.917,86.904 136.504,86.904 R15.1@136.525,86.925
  Bottom Layer w0.508: 117.983,62.738 121.285,66.04 121.285,79.121 126.163,83.999 SW2.3
"NetMCU ESP32_35": "MCU ESP32.35" R16.1 SW3.3 SW3.4 | length 24.7
  Top Layer w0.508: SW3.3 SW3.4 ; SW3.4@133.171,76.744 136.504,76.744 R16.1@136.525,76.765
  Bottom Layer w0.508: SW3.3 126.163,76.66 126.873,75.95 126.873,64.008 128.143,62.738
NetR1_1: R1.1 T6.1 | length 6.9
  Top Layer w0.508: T6.1 24.319,114.97 24.319,114.718 25.349,113.688 25.349,112.014 24.003,110.668 R1.1
NetR7_1: R7.1 T1.2 | length 12.6
  Top Layer w0.508: T1.2 35.643,88.138 35.941,87.84 R7.1 R7.1@35.564,82.099
NetR12_1: R12.1 VR2.1 | length 4.1
  Top Layer w0.508: R12.1@16.129,94.939 16.129,90.972 VR2.1
NetR12_2: R12.2 R22.1 T3.2 | length 83.4
  Top Layer w0.508: R12.2@18.415,95.561 18.472,95.504 T3.2 ; R12.2 R12.2@18.923,95.701
  Bottom Layer w0.508: T3.2 37.763,95.504 38.227,95.968 38.227,109.833 38.376,109.982 44.831,109.982 53.467,118.618 67.945,118.618 71.247,115.316 R22.1
NetR17_1: R17.1 T2.2 | length 4.8
  Top Layer w0.508: T2.2 R17.1
NetR20_1: R20.1 T2.3 | length 3
  Top Layer w0.508: R20.1@30.41,62.484 T2.3
NetR22_2: R22.2 R24.1 | length 10.4
  Top Layer w0.508: R22.2@95.123,114.808 R24.1@105.537,114.808
Ub: C21.2 D6.1 IC2.1 J1.7 J2.7 J3.7 | length 133.2
  Top Layer w0.508: IC2.1@55.951,8.072 IC2.1
  Bottom Layer w0.508: C21.2@37.338,38.897 41.946,38.897 D6.1 47.371,33.472 47.371,8.531 47.52,8.382 56.261,8.382 IC2.1 57.016,8.135 57.626,8.135 59.258,6.502 81.157,6.502 88.011,13.357 ; J1.7 88.011,13.357 ; J2.7@109.033,15.24 109.033,13.357 108.884,13.208 111.484,13.208 ; J3.7@130.369,14.986 130.369,13.357 130.22,13.208 111.484,13.208 ; 88.011,13.357 88.16,13.208 109.033,13.208 111.484,13.208
pads on no net: "MCU ESP32.2" "MCU ESP32.3" "MCU ESP32.4" "MCU ESP32.6" "MCU ESP32.7" "MCU ESP32.8" "MCU ESP32.9" "MCU ESP32.12" "MCU ESP32.13" "MCU ESP32.15" "MCU ESP32.16" "MCU ESP32.17" "MCU ESP32.18" "MCU ESP32.21" "MCU ESP32.23" "MCU ESP32.24" "MCU ESP32.27" "MCU ESP32.28" "MCU ESP32.29" "MCU ESP32.32" "MCU ESP32.33" "MCU ESP32.34" "MCU ESP32.36" "MCU ESP32.37" "MCU ESP32.38" IC1.11 IC1.12 IC1.13 IC3.1 IC3.5 IC4.7 IC4.13 J1.MH1 J1.MH2 J2.MH1 J2.MH2 J3.MH1 J3.MH2 K4.3 lcd.8 lcd.9 lcd.10

## Other copper
Multi-Layer:
  lines w0.254: 113.157,141.478 113.157,139.954 ; 114.681,139.954 113.157,139.954 ; 120.523,145.034 116.713,141.224 116.713,143.51 113.665,140.462 113.157,139.954
  text "CAUTION: HIGH VOLTAGE" at 112.254,147.254 h1.52

## Silkscreen, mask and mechanical layers (free items; w line width, h text height)
Mechanical 1:
  lines w0.5: 144,160 144,160

## Text inside footprints (layer, text, board x,y; h text height)
BZ1: Top Overlay "+" at 19.177,68.834 h1.52 r90
R22: Mechanical 7 "0.3in/7.62mm" at 86.868,118.364 h0.64; Mechanical 7 "0.5in/12.7mm" at 86.868,111.633 h0.64; Mechanical 7 "0.1in/2.54mm" at 98.171,114.998 h0.64; Mechanical 7 "Alt 2 Pad Style: OX90Y60D30P" at 79.883,103.124 h1.27; Mechanical 7 "Alt 1 Pad Style: OX60Y90D30P" at 79.883,105.029 h1.27; Mechanical 7 "Default Pad Style: EX55Y55D35P" at 79.248,106.934 h1.27; Mechanical 7 "Pin 1 Pad Style: SX55Y55D35P" at 79.883,108.839 h1.27
R23: Mechanical 7 "0.3in/7.62mm" at 130.429,131.445 h0.64 r270; Mechanical 7 "0.5in/12.7mm" at 123.698,131.445 h0.64 r270; Mechanical 7 "0.1in/2.54mm" at 127.063,120.142 h0.64 r270; Mechanical 7 "Alt 2 Pad Style: OX90Y60D30P" at 115.189,138.43 h1.27 r270; Mechanical 7 "Alt 1 Pad Style: OX60Y90D30P" at 117.094,138.43 h1.27 r270; Mechanical 7 "Default Pad Style: EX55Y55D35P" at 118.999,139.065 h1.27 r270; Mechanical 7 "Pin 1 Pad Style: SX55Y55D35P" at 120.904,138.43 h1.27 r270
R24: Mechanical 7 "0.3in/7.62mm" at 109.982,118.364 h0.64; Mechanical 7 "0.5in/12.7mm" at 109.982,111.633 h0.64; Mechanical 7 "0.1in/2.54mm" at 121.285,114.998 h0.64; Mechanical 7 "Alt 2 Pad Style: OX90Y60D30P" at 102.997,103.124 h1.27; Mechanical 7 "Alt 1 Pad Style: OX60Y90D30P" at 102.997,105.029 h1.27; Mechanical 7 "Default Pad Style: EX55Y55D35P" at 102.362,106.934 h1.27; Mechanical 7 "Pin 1 Pad Style: SX55Y55D35P" at 102.997,108.839 h1.27
R25: Mechanical 7 "0.3in/7.62mm" at 132.461,127.635 h0.64 r90; Mechanical 7 "0.5in/12.7mm" at 139.192,127.635 h0.64 r90; Mechanical 7 "0.1in/2.54mm" at 135.826,138.938 h0.64 r90; Mechanical 7 "Alt 2 Pad Style: OX90Y60D30P" at 147.701,120.65 h1.27 r90; Mechanical 7 "Alt 1 Pad Style: OX60Y90D30P" at 145.796,120.65 h1.27 r90; Mechanical 7 "Default Pad Style: EX55Y55D35P" at 143.891,120.015 h1.27 r90; Mechanical 7 "Pin 1 Pad Style: SX55Y55D35P" at 141.986,120.65 h1.27 r90